# EAGLE board Adafruit HX711 ADC Breakout (EAGLE 9.6.2)
REV: A
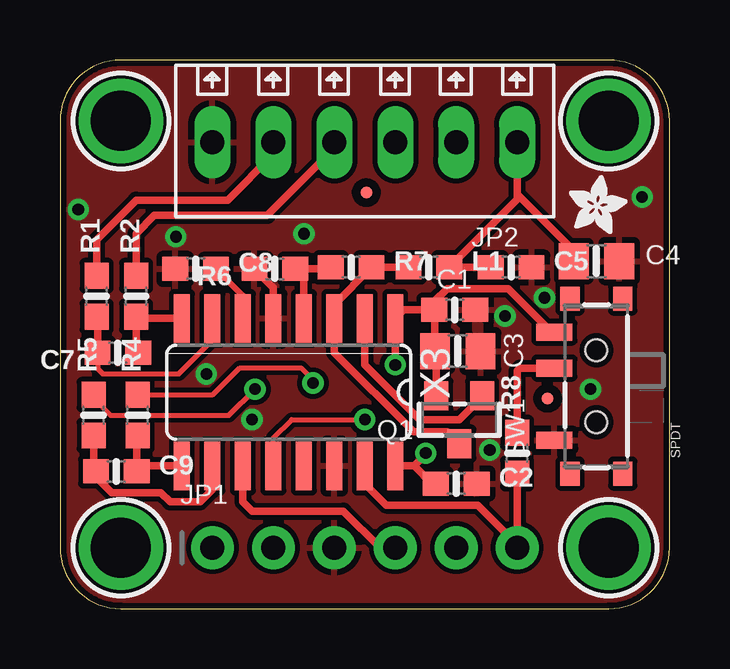
[diagram p0: board, top side]
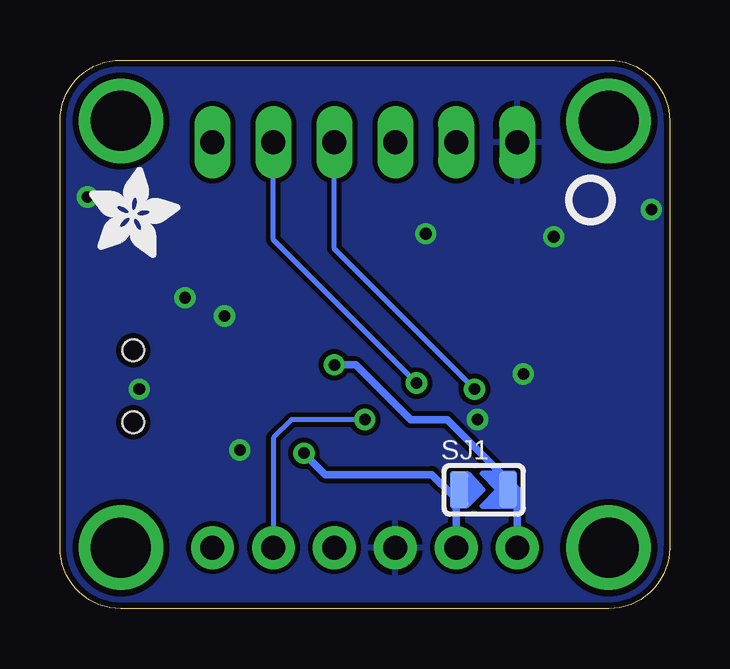
[diagram p1: board, bottom side, seen from below]

Size 25.4 x 22.86 mm. Coordinates in mm from the lower left corner, seen from the top.
Outline: 0,20.32 0,2.54 arc90 2.54,0 22.86,0 arc90 25.4,2.54 25.4,20.32 arc90 22.86,22.86 2.54,22.86 arc90 0,20.32
Copper layers (1*16): Top 0.035mm / dielectric 1.5mm / Bottom 0.035mm
Design rules "adafruit *": minimum track width 8mil, minimum drill 15.5mil, track to track 8mil, track to pad 8mil, pad to pad 8mil, via to via 8mil, smd to smd 8mil, copper to edge 10mil, drill to drill 8mil, minimum pad ring 10mil, minimum via ring 8mil, stop-mask expansion 2mil, vias tented up to drill 20mil, thermal gap 10mil
Net classes: 1 highpower: width 0.254 mm, drill 0.483 mm; 2 lowpower: width 0.254 mm, drill 0.483 mm

## Footprints (pad centres in the part's own frame; a part is rotated, then mirrored left to right if it is on the bottom)
0603-NO = smd 1.075 x 1: 1 -0.85,0; 2 0.85,0
0805-NO = smd 1.24 x 1.5: 1 -0.95,0; 2 0.95,0
FIDUCIAL_0.5MM = smd 0.5 x 0.5: 1 0,0
1X06_ROUND_70 = drill 1 pad 1.778: 1 -6.35,0; 2 -3.81,0; 3 -1.27,0; 4 1.27,0; 5 3.81,0; 6 6.35,0
1X06_2.54MMTERMINAL = drill 1 long: 1 6.35,0; 2 3.81,0; 3 1.27,0; 4 -1.27,0; 5 -3.81,0; 6 -6.35,0
SOT23-WIDE = smd 1 x 1.2: 1 -0.95,-1; 2 0.95,-1; 3 0,1
SOLDERJUMPER_ARROW_NOPASTE = smd 0.762 x 1.524: 1 -1.016,0; 2 1.016,0
SPDT_SMT_SSSS811101 = smd 0.7 x 1.5: A -2.25,1.242; B 0.75,1.242; C 2.25,1.242 | smd 1 x 0.8: SUP1 -3.65,0.592; SUP2 -3.65,-1.608; SUP3 3.65,0.592; SUP4 3.65,-1.608 | hole 0.9: -1.5,-0.508; 1.5,-0.508
MOUNTINGHOLE_2.5_PLATED = drill 2.5 pad 3.2: P$1 0,0
SO16 = smd 0.66 x 2.032: 1 -4.445,-3.073; 2 -3.175,-3.073; 3 -1.905,-3.073; 4 -0.635,-3.073; 5 0.635,-3.073; 6 1.905,-3.073; 7 3.175,-3.073; 8 4.445,-3.073; 9 4.445,3.073; 10 3.175,3.073; 11 1.905,3.073; 12 0.635,3.073; 13 -0.635,3.073; 14 -1.905,3.073; 15 -3.175,3.073; 16 -4.445,3.073

## Placement (x,y rotation side)
C1  0.1uF  [0603-NO]  16.45,12.45 0 top
C2  0.1uF  [0603-NO]  16.51,5.21 0 top
C3  10uF  [0805-NO]  16.57,10.73 0 top
C4  10uF  [0805-NO]  22.35,14.48 0 top
C5  0.1uF  [0603-NO]  18.8,14.22 0 top
C7  0.1uF  [0603-NO]  2.41,10.67 180 top
C8  0.1uF  [0603-NO]  5.65,14.16 0 top
C9  0.1uF  [0603-NO]  2.35,5.71 0 top
FID3  FIDUCIAL_0.5MM  [FIDUCIAL_0.5MM]  12.76,17.34 0 top
FID4  FIDUCIAL_0.5MM  [FIDUCIAL_0.5MM]  20.32,8.76 0 top
JP1  [1X06_ROUND_70]  12.7,2.54 0 top
JP2  6pin 2.54mm  [1X06_2.54MMTERMINAL]  12.7,19.43 0 top
L1  3.3uH MLF1608A3R3JT000  [0603-NO]  15.37,14.22 0 top
PLABEL0  [PLABEL0]  6.35,0.89 0 top
PLABEL1  [PLABEL1]  11.43,0.89 0 top
PLABEL2  [PLABEL2]  14.1,4.13 0 top
PLABEL3  [PLABEL3]  16.64,0.89 0 top
PLABEL4  [PLABEL4]  19.3,4.13 0 top
PLABEL5  [PLABEL5]  2.41,16.19 0 top
PLABEL6  [PLABEL6]  24,12.32 0 top
PLABEL7  [PLABEL7]  18.29,15.05 0 top
PLABEL8  [PLABEL8]  10.48,14.99 0 top
PLABEL9  [PLABEL9]  7.94,14.99 0 top
PLABEL10  [PLABEL10]  5.65,14.92 0 top
PLABEL11  [PLABEL11]  8.95,4.13 0 top
PLABEL12  [PLABEL12]  13.14,14.99 0 top
PLABEL13  [PLABEL13]  15.81,14.99 0 top
PLABEL14  [PLABEL14]  24.26,5.21 0 top
PLABEL15  [PLABEL15]  19.68,8 90 top
PLABEL16  [PLABEL16]  11.68,12.45 0 bottom
PLABEL17  [PLABEL17]  12.7,22.1 0 bottom
PLABEL18  [PLABEL18]  12.7,0.89 0 bottom
PLABEL19  [PLABEL19]  9.14,15.75 90 bottom
PLABEL20  [PLABEL20]  11.68,15.75 90 bottom
PLABEL21  [PLABEL21]  19.18,16.51 90 bottom
PLABEL22  [PLABEL22]  6.6,16 90 bottom
PLABEL23  [PLABEL23]  25.4,6.99 0 bottom
Q1  S8550  [SOT23-WIDE]  16.64,7.87 180 top
R1  100  [0603-NO]  1.52,13.02 90 top
R2  100  [0603-NO]  3.17,13.02 90 top
R4  100  [0603-NO]  3.24,8.06 90 top
R5  100  [0603-NO]  1.4,8.06 90 top
R6  8.2K  [0603-NO]  8.95,14.16 180 top
R7  20K  [0603-NO]  12.13,14.22 0 top
R8  10K  [0603-NO]  19.05,6.48 90 top
SJ1  [SOLDERJUMPER_ARROW_NOPASTE]  7.75,4.95 0 bottom
SW1  SPDT  [SPDT_SMT_SSSS811101]  21.84,9.27 90 top
U$1  MOUNTINGHOLE2.5  [MOUNTINGHOLE_2.5_PLATED]  2.54,20.32 0 top
U$11  [ADAFRUIT_2.5MM]  21.21,15.62 0 top
U$17  MOUNTINGHOLE2.5  [MOUNTINGHOLE_2.5_PLATED]  22.86,20.32 0 top
U$19  MOUNTINGHOLE2.5  [MOUNTINGHOLE_2.5_PLATED]  2.54,2.54 0 top
U$21  MOUNTINGHOLE2.5  [MOUNTINGHOLE_2.5_PLATED]  22.86,2.54 0 top
U$22  [ADAFRUIT_3.5MM]  24.19,14.61 0 bottom
U$25  [PCBFEAT-REV-040]  3.3,17.02 0 bottom
X3  HX711  [SO16]  9.53,9.02 180 top

## Library data of the parts
C1-C5 C7-C9 FID3 FID4 JP1 L1 Q1 R1 R2 R4-R8 U$11 U$22 U$25 = microbuilder
JP2 = microbuilder; FORCETHM: 1
PLABEL0 PLABEL1-PLABEL23 = pinguin
SJ1 = microbuilder; BOM: EXCLUDE
SW1 = adafruit_electromech
U$1 U$17 U$19 U$21 = adafruit_electromech; BOM: EXCLUDE
X3 = adafruit_sensor

## Nets
A+: JP2.4 R2.2
A-: JP2.5 R1.2
AVDD: L1.1 Q1.3 R7.2 X3.3
B+: JP2.3 R5.2
B-: JP2.2 R4.2
BASE: Q1.1 X3.2
DATAOUT: JP1.5 X3.12
GND [highpower]: C1.2 C2.2 C3.2 C4.2 C5.2 C8.1 JP1.3 JP2.6 R6.2 SW1.A X3.5 X3.14
N$2: R8.2 SW1.B
N$5: C7.1 R2.1 X3.8
N$6: C7.2 R1.1 X3.7
N$10: C9.1 R5.1 X3.10
N$11: C9.2 R4.1 X3.9
RATE: JP1.6 R8.1 X3.15
SCLK: JP1.4 X3.11
V+: C1.1 C3.1 JP1.1 Q1.2 SJ1.2 SW1.C X3.1
VBG: C8.2 X3.6
VDDIO: C2.1 JP1.2 SJ1.1 X3.16
VFB: R6.1 R7.1 X3.4
VPP: C4.1 C5.1 JP2.1 L1.2

## Tracks (layer width: path | path; a pad name or v marks a point on that pad's centre or on a via)
A+
  Top 0.305: R2.2 3.17,15.62 3.94,16.38 8.64,16.38 11.43,19.18 JP2.4
A-
  Top 0.305: R1.2 1.52,15.37 3.17,17.02 6.99,17.02 8.89,18.92 JP2.5
AVDD
  Top 0.305: L1.1 R7.2 11.43,12.67 X3.3 11.43,10.67 14.73,7.37 16.14,7.37 Q1.3
B+  (via drill 0.48)
  Top 0.203: R5.2 1.4,8.76 2.1,8.06 7.04,8.06 v8.13,9.14
  Bottom 0.203: v8.13,9.14 13.97,14.99 JP2.3
B-  (via drill 0.48)
  Top 0.203: R4.2 6.38,8.91 7.49,10.03 10.03,10.03 10.54,9.53 v10.54,9.4
  Bottom 0.203: v10.54,9.4 16.51,15.37 JP2.2
BASE
  Top 0.305: X3.2 12.7,10.16 14.99,7.87 16.64,7.87 17.59,8.82 Q1.1
DATAOUT  (via drill 0.48)
  Top 0.203: X3.12 8.89,7.11 9.65,7.87 v12.7,7.87
  Bottom 0.203: v12.7,7.87 15.75,7.87 16.51,7.11 JP1.5
GND  (via drill 0.48)
  Top 0.305: X3.5 8.89,13.37 R6.2
  other vias: 22.1,9.14 24.26,17.14 18.54,12.19 17.91,6.6 8,7.87 6.1,9.78 4.83,15.49 10.16,15.62 0.76,16.64 20.19,12.95
  pour Top: 0,22.86 25.4,22.86 25.4,0 0,0
  pour Bottom: 0,22.86 25.4,22.86 25.4,0 0,0
N$2
  Top 0.305: R8.2 19.05,9.91 19.16,10.02 SW1.B
N$5
  Top 0.305: C7.1 3.17,10.76 R2.1 3.25,12.09 X3.8
N$6
  Top 0.203: C7.2 1.56,9.99 1.78,9.78 4.95,9.78 6.35,11.18 X3.7
  Top 0.305: R1.1 1.56,12.13 C7.2
N$10
  Top 0.305: X3.10 6.35,4.95 5.84,4.45 4.59,4.45 4.2,4.83 2.15,4.83 1.5,5.49 C9.1 1.4,5.82 R5.1
N$11
  Top 0.305: R4.1 3.2,7.18 C9.2 3.43,5.94 X3.9
RATE
  Top 0.305: X3.15 12.7,5.21 13.59,4.32 17.4,4.32 19.05,2.67 JP1.6 R8.1
SCLK
  Top 0.305: X3.11 7.62,4.45 8,4.06 11.81,4.06 13.34,2.54 JP1.4
V+  (via drill 0.48)
  Top 0.305: C1.1 14.33,12.45 X3.1 v13.97,10.16 | C1.1 15.62,12.42 C3.1 15.69,10.67 Q1.2 | C1.1 15.6,12.8 16.13,13.34 18.67,13.34 20.48,11.52 SW1.C
  Bottom 0.305: JP1.1 6.35,4.95 6.6,5.21 | 6.6,5.21 9.27,7.87 10.79,7.87 13.08,10.16 v13.97,10.16 | SJ1.2 6.6,5.08 6.6,5.21
VBG
  Top 0.254: X3.6 7.62,13.04 C8.2
VDDIO  (via drill 0.48)
  Top 0.305: X3.16 14.76,5.94 | C2.1 15.49,5.21 14.76,5.94 | 14.76,5.94 15.24,6.43 v15.24,6.48
  Bottom 0.305: v15.24,6.48 14.35,5.59 9.91,5.59 9.02,4.7 | 9.02,4.7 8.89,4.57 JP1.2 | SJ1.1 9.02,4.7
VFB
  Top 0.305: X3.4 10.16,13.8 R6.1 11.21,14.16 R7.1
VPP
  Top 0.305: 19.05,17.27 19.05,17.06 L1.2 C5.1 | 19.05,17.27 JP2.1 | C4.1 21.4,14.92 19.05,17.27

## Text on the board
Pinguin_tBackup: HX / 711 | E- | A- | A+ | B+ | B- | E+ | H | Rate | L | VIO | SCK | RATE | VIN | GND | DATA
Pinguin_bBackup: Bridge&Gauge Sensors | Black | White | Green | Red | HX711 24-bit ADC | Chan A Gain: x64 or x128 / Chan B Gain: x32 / Rate: 10 or 80 SPS | Vio/V+: 3-5VDC